# Altium PCB PCB1.PcbDoc (part 5 of 7)
Units mil, origin at the board's own origin, x right, y up, seen from the top; angles counter-clockwise.
Board outline 7650 x 4400 mil, 2 copper layers (Top Layer, Bottom Layer); 123 components, 190 nets, 788 pads, 165 vias.
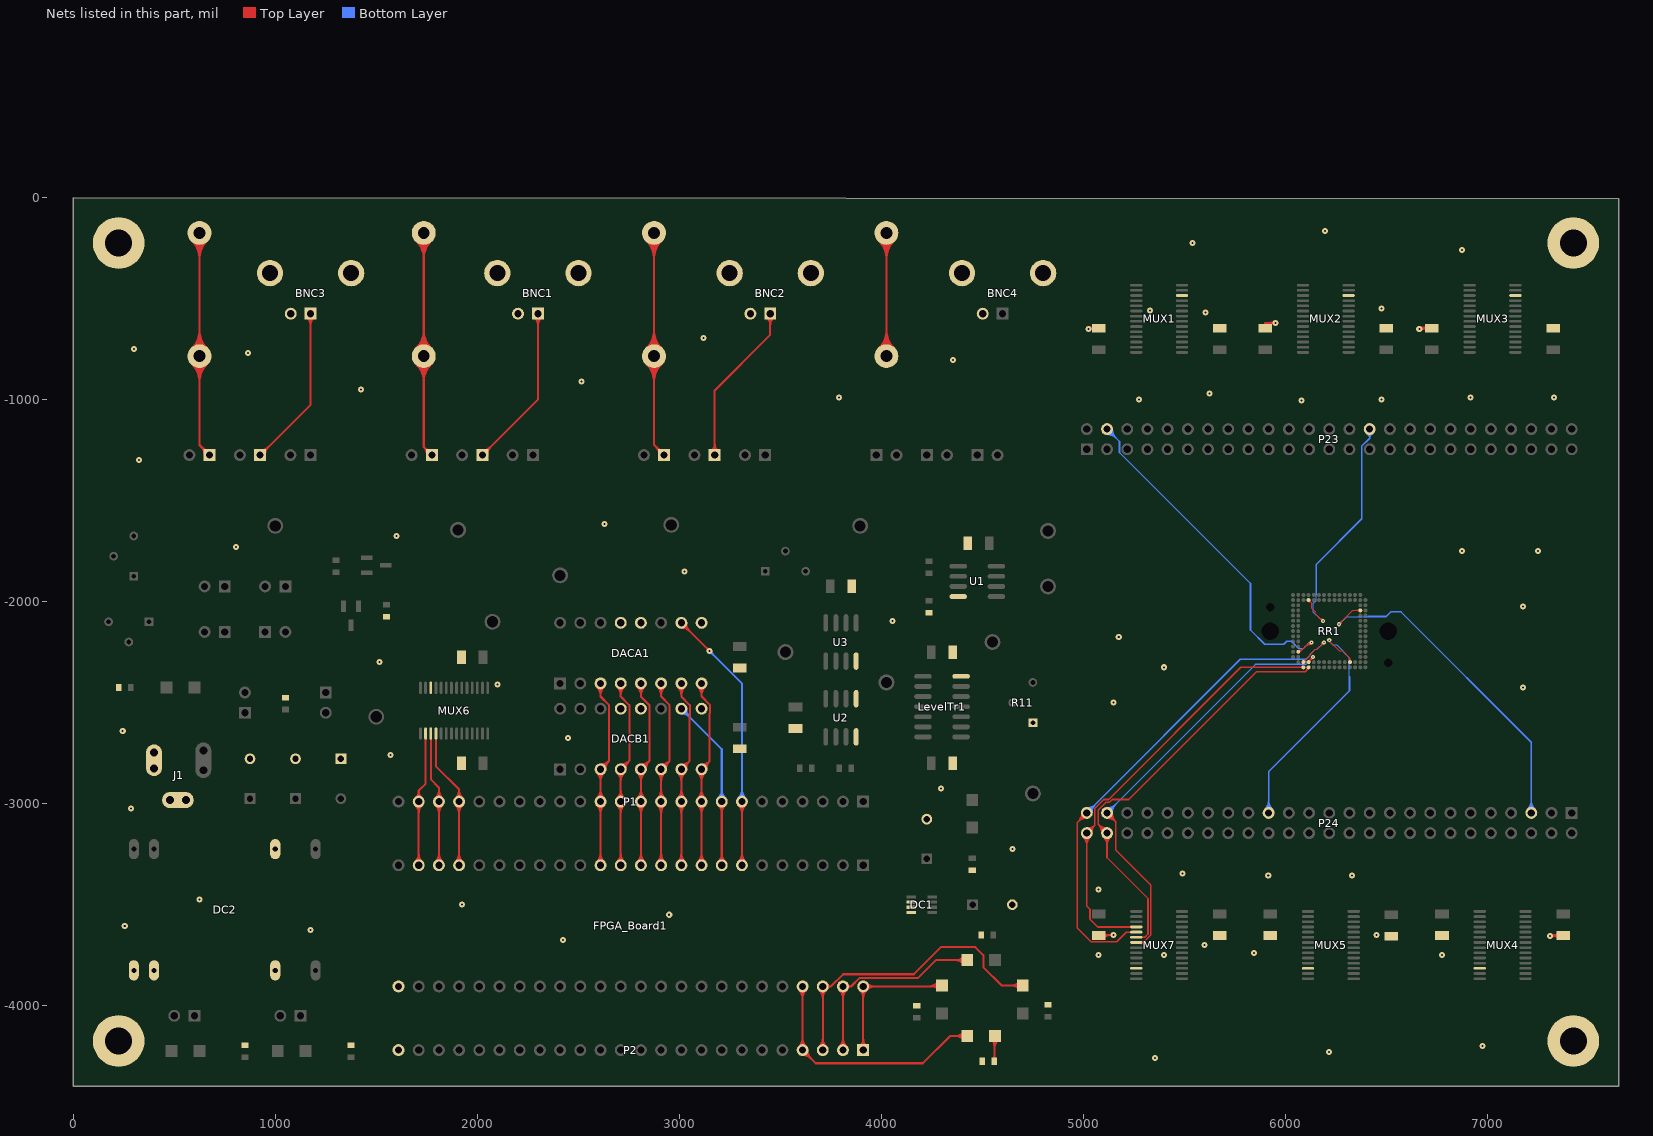
[diagram p5: the nets of this part, all layers, seen from the top]

## Via types
v1: diameter 30, hole 10, Top Layer to Bottom Layer, 118 vias
v2: diameter 20, hole 6, Top Layer to Bottom Layer, 47 vias

## Nets (pads, with @x,y where several pads share a name; then routed paths per layer and width w, separated by ;. In a path a pad name is that pad's centre, name@x,y a point inside that pad or via, vN(x,y) a via of type N, cw(c..) or ccw(c..) an arc to the next point about the centre after c; other vN are vias at no path point) (continued)
CELL92: MUX7.7 P24.47 RR1.97 | length 3256.5
  Top Layer w5: RR1.97@6112.03,-2299.01 cw(c6122.5,-2301.15) 6119.73,-2290.84 ; RR1.97@6112.74,-2292.45 ccw(c6105.79,-2266.51) v2@6129.05,-2279.94 ; RR1.97@6114.03,-2297.28 ccw(c6110.2,-2282.99) 6123.01,-2290.39 ; RR1.97@6114.64,-2299.54 6137.43,-2276.75 6137.43,-2275.2 6137.26,-2275.2 6137,-2274.94 v2(6137,-2274) ; RR1.97@6115.17,-2302.15 ccw(c6113.03,-2291.68) 6123.35,-2294.45 ; RR1.97@6117.39,-2292.73 ccw(c6118.99,-2288.75) 6122.72,-2290.9 ; 6120.75,-2288.23 cw(c6137,-2304.48) v2@6137,-2281.5 ; 6125.62,-2283.36 ccw(c6116.26,-2274) v2@6129.5,-2274 ; 6127.68,-2280.78 cw(c6140.56,-2284.23) v2@6136.18,-2271.64 ; 6127.17,-2287.01 ccw(c6139.71,-2299.54) 6121.98,-2299.54 cw(c6139.71,-2299.54) 6127.17,-2287.01 ; 6127.17,-2287.01 cw(c6114.64,-2274.47) 6114.64,-2292.2 ccw(c6114.64,-2274.47) 6127.17,-2287.01 ; v2@6129.5,-2274 cw(c6103.71,-2274) 6121.95,-2292.23 ccw(c6103.71,-2274) v2@6129.5,-2274 ; v2@6137,-2281.5 ccw(c6137,-2291.93) 6129.63,-2284.55 cw(c6137,-2291.93) v2@6137,-2281.5 ; RR1.97@6121.73,-2297.64 cw(c6130.03,-2295.42) 6122.59,-2291.12 ccw(c6130.03,-2295.42) RR1.97@6121.73,-2297.64 ; 6130.48,-2283.7 ccw(c6120.78,-2274) 6134.5,-2274 cw(c6120.78,-2274) 6130.48,-2283.7
  Top Layer w8: P24.47@5102.88,-3049.18 ccw(c5135.28,-3041.88) 5126.99,-3074.04 ; P24.47@5110.69,-3047.42 ccw(c5149.63,-3038.65) 5139.67,-3077.31 ; P24.47@5117,-3073 P24.47@5117,-3046 5160,-3089 ; P24.47@5118.42,-3039.69 cw(c5109.65,-3078.63) 5148.31,-3068.67 ; P24.47@5120.18,-3031.88 cw(c5112.88,-3064.28) 5145.04,-3055.99 ; MUX7.7@5261.81,-3687.2 5296.18,-3687.2 5333,-3650.38 5333,-3403 5160,-3230 5160,-3089 ; MUX7.7@5287.94,-3688.65 cw(c5302.23,-3696.9) 5297.96,-3680.96 ; 5146.52,-3075.52 ccw(c5117.56,-3104.49) 5117.17,-3063.53 cw(c5117.56,-3104.49) 5146.52,-3075.52 ; 5146.52,-3075.52 cw(c5175.49,-3046.56) 5134.53,-3046.17 ccw(c5175.49,-3046.56) 5146.52,-3075.52 ; 5160,-3089 ccw(c5117.81,-3131.18) 5117.24,-3071.53 cw(c5117.81,-3131.18) 5160,-3089 ; 5160,-3089 cw(c5202.18,-3046.81) 5142.53,-3046.24 ccw(c5202.18,-3046.81) 5160,-3089 ; 5292.41,-3687.2 ccw(c5292.41,-3694.18) 5287.48,-3689.25 cw(c5292.41,-3694.18) 5292.41,-3687.2 ; 5292.41,-3687.2 cw(c5292.41,-3680.23) 5287.48,-3685.16 ccw(c5292.41,-3680.23) 5292.41,-3687.2 ; MUX7.7@5285.43,-3692.32 ccw(c5285.43,-3678.71) 5295.06,-3688.33 cw(c5285.43,-3678.71) MUX7.7@5285.43,-3692.32 ; MUX7.7@5285.43,-3684.31 ccw(c5285.43,-3651.39) 5308.71,-3674.67 cw(c5285.43,-3651.39) MUX7.7@5285.43,-3684.31
  Bottom Layer w5: 6102,-2311 6137.26,-2275.74 6137.26,-2274.26 v2(6137,-2274) ; 6127.81,-2280.32 cw(c6139.84,-2283.54) v2@6136.29,-2271.6 ; 6122.78,-2290.22 ccw(c6106.57,-2274) 6129.5,-2274 cw(c6106.57,-2274) 6122.78,-2290.22 ; 6127.61,-2285.39 cw(c6137,-2294.78) 6137,-2281.5 ccw(c6137,-2294.78) 6127.61,-2285.39
  Bottom Layer w8: P24.47@5117,-3046 5852,-2311 6102,-2311 ; P24.47@5117,-3028.47 ccw(c5117,-2986.16) 5146.92,-3016.08 ccw(c5176.84,-3046) P24.47@5134.53,-3046 ; P24.47@5117,-3020.47 ccw(c5117,-2958.84) 5160.58,-3002.42 ccw(c5204.16,-3046) P24.47@5142.53,-3046
CELL93: MUX7.6 P24.48 RR1.98 | length 2508.4
  Top Layer w8: P24.48@5091.47,-3146 ccw(c5029.84,-3146) 5073.42,-3102.42 ccw(c5117,-3058.84) P24.48@5117,-3120.47 ; P24.48@5098.95,-3164.05 cw(c5055.37,-3207.63) 5117,-3207.63 cw(c5178.63,-3207.63) P24.48@5135.05,-3164.05 ; P24.48@5099.47,-3146 ccw(c5057.16,-3146) 5087.08,-3116.08 ccw(c5117,-3086.16) P24.48@5117,-3128.47 ; P24.48@5104.61,-3158.39 cw(c5074.68,-3188.32) 5117,-3188.32 cw(c5159.32,-3188.32) P24.48@5129.39,-3158.39 ; MUX7.6@5261.81,-3661.61 5303.39,-3661.61 5320,-3645 5320,-3470 5117,-3267 P24.48@5117,-3146 5073.31,-3102.31 5073.31,-3031.69 5112.73,-2992.27 5130.38,-2992.27 5143.38,-2979.27 5225,-2979.27 5857.29,-2346.98 6098.09,-2346.98 6114.64,-2330.43 RR1.98@6114.64,-2325.13 ; 5292.41,-3661.61 ccw(c5292.41,-3668.59) 5287.48,-3663.66 cw(c5292.41,-3668.59) 5292.41,-3661.61 ; 5292.41,-3661.61 cw(c5292.41,-3654.64) 5287.48,-3659.57 ccw(c5292.41,-3654.64) 5292.41,-3661.61 ; 6100.92,-2344.15 ccw(c6081.9,-2325.13) 6108.8,-2325.13 cw(c6081.9,-2325.13) 6100.92,-2344.15
CELL94: MUX7.5 P24.49 RR1.99 | length 3155.7
  Top Layer w5: RR1.99@6089.05,-2299.54 6089.05,-2297.2 6132.75,-2253.5 6132.75,-2251.5 6147.51,-2236.74 6158,-2236.74 6191,-2203.74 v2(6191,-2202) ; RR1.99@6089.84,-2302.08 ccw(c6086.18,-2290.42) 6097.99,-2293.58 ; 6181.83,-2208.22 cw(c6193.68,-2211.39) v2@6190.31,-2199.6 ; 6186.13,-2210.8 ccw(c6183.55,-2201.14) v2@6193.48,-2202.29 ; RR1.99@6089.05,-2292.2 ccw(c6089.05,-2280.12) 6097.59,-2288.66 cw(c6089.05,-2280.12) RR1.99@6089.05,-2292.2 ; RR1.99@6096.39,-2299.54 cw(c6119.76,-2299.54) 6103.24,-2283.02 ccw(c6119.76,-2299.54) RR1.99@6096.39,-2299.54 ; 6176.97,-2217.77 ccw(c6161.19,-2202) 6183.5,-2202 cw(c6161.19,-2202) 6176.97,-2217.77 ; 6181.17,-2213.57 cw(c6191,-2223.41) 6191,-2209.5 ccw(c6191,-2223.41) 6181.17,-2213.57
  Top Layer w8: P24.49@4991.47,-3046 cw(c4929.84,-3046) 4973.42,-3089.58 cw(c5017,-3133.16) P24.49@5017,-3071.53 ; P24.49@4999.47,-3046 cw(c4957.16,-3046) 4987.08,-3075.92 cw(c5017,-3105.84) P24.49@5017,-3063.53 ; P24.49@5017,-3046 4970,-3093 4970,-3616 5037.81,-3683.8 5165,-3683.8 5212.78,-3636.02 MUX7.5@5261.81,-3636.02 ; 5231.21,-3636.02 ccw(c5231.21,-3629.05) 5236.15,-3633.98 cw(c5231.21,-3629.05) 5231.21,-3636.02 ; 5231.21,-3636.02 cw(c5231.21,-3643) 5236.15,-3638.07 ccw(c5231.21,-3643) 5231.21,-3636.02
  Bottom Layer w5: 6102,-2286 6119.5,-2268.5 6119.5,-2266.25 6123.5,-2262.25 6123.5,-2260.75 6147.51,-2236.74 6156.26,-2236.74 v2(6191,-2202) ; 6178.2,-2214.8 ccw(c6165.39,-2202) 6183.5,-2202 cw(c6165.39,-2202) 6178.2,-2214.8 ; 6178.2,-2214.8 cw(c6191,-2227.61) 6191,-2209.5 ccw(c6191,-2227.61) 6178.2,-2214.8
  Bottom Layer w8: P24.49@5017,-3046 5777,-2286 6102,-2286 ; P24.49@5017,-3028.47 ccw(c5017,-2986.16) 5046.92,-3016.08 ccw(c5076.84,-3046) P24.49@5034.53,-3046 ; P24.49@5017,-3020.47 ccw(c5017,-2958.84) 5060.58,-3002.42 ccw(c5104.16,-3046) P24.49@5042.53,-3046
CELL95: MUX7.4 P24.50 RR1.100 | length 2502.1
  Top Layer w8: P24.50@4998.95,-3164.05 cw(c4955.37,-3207.63) 5017,-3207.63 cw(c5078.63,-3207.63) P24.50@5035.05,-3164.05 ; P24.50@5004.61,-3158.39 cw(c4974.68,-3188.32) 5017,-3188.32 cw(c5059.32,-3188.32) P24.50@5029.39,-3158.39 ; P24.50@5018.59,-3128.54 ccw(c5021.42,-3097.52) 5043.45,-3119.55 ccw(c5065.48,-3141.58) P24.50@5034.46,-3144.41 ; P24.50@5019.32,-3120.58 ccw(c5023.44,-3075.39) 5055.53,-3107.47 ccw(c5087.61,-3139.56) P24.50@5042.42,-3143.68 ; MUX7.4@5261.81,-3610.43 5070.74,-3610.43 5032.54,-3572.23 5032.54,-3522.54 5017,-3507 P24.50@5017,-3146 5055.53,-3107.47 5055.53,-3024.47 5100.73,-2979.27 5125,-2979.27 5779.14,-2325.13 RR1.100@6089.05,-2325.13 ; 5231.21,-3610.43 ccw(c5231.21,-3603.46) 5236.15,-3608.39 cw(c5231.21,-3603.46) 5231.21,-3610.43 ; 5231.21,-3610.43 cw(c5231.21,-3617.41) 5236.15,-3612.48 ccw(c5231.21,-3617.41) 5231.21,-3610.43 ; 6074.94,-2325.13 ccw(c6074.94,-2311.03) 6084.92,-2321 cw(c6074.94,-2311.03) 6074.94,-2325.13 ; 6074.94,-2325.13 cw(c6074.94,-2339.24) 6084.92,-2329.27 ccw(c6074.94,-2339.24) 6074.94,-2325.13
DAC0: DACA1.8 DACB1.8 FPGA_Board1.9 P1.9 | length 1813.8
  Top Layer w10: FPGA_Board1.9@3092.66,-3287.66 ccw(c3050.79,-3245.79) 3110,-3245.79 ccw(c3169.21,-3245.79) FPGA_Board1.9@3127.34,-3287.66 ; P1.9@3092.66,-3007.34 cw(c3050.79,-3049.21) 3110,-3049.21 cw(c3169.21,-3049.21) P1.9@3127.34,-3007.34 ; P1.9@3092.66,-2972.66 ccw(c3050.79,-2930.79) 3110,-2930.79 ccw(c3169.21,-2930.79) P1.9@3127.34,-2972.66 ; DACB1.8@3092.66,-2847.34 cw(c3050.79,-2889.21) 3110,-2889.21 cw(c3169.21,-2889.21) DACB1.8@3127.34,-2847.34 ; DACA1.8@3092.66,-2422.34 cw(c3050.78,-2464.22) 3110,-2464.22 cw(c3169.21,-2464.22) DACA1.8@3127.34,-2422.34 ; FPGA_Board1.9@3099.73,-3294.73 ccw(c3074.93,-3269.93) 3110,-3269.93 ccw(c3145.07,-3269.93) FPGA_Board1.9@3120.27,-3294.73 ; P1.9@3099.73,-3000.27 cw(c3074.93,-3025.07) 3110,-3025.07 cw(c3145.07,-3025.07) P1.9@3120.27,-3000.27 ; P1.9@3099.73,-2979.73 ccw(c3074.93,-2954.93) 3110,-2954.93 ccw(c3145.07,-2954.93) P1.9@3120.27,-2979.73 ; DACB1.8@3099.73,-2840.27 cw(c3074.93,-2865.07) 3110,-2865.07 cw(c3145.07,-2865.07) DACB1.8@3120.27,-2840.27 ; DACA1.8@3099.73,-2415.27 cw(c3074.93,-2440.07) 3110,-2440.07 cw(c3145.07,-2440.07) DACA1.8@3120.27,-2415.27 ; FPGA_Board1.9@3110,-3305 P1.9@3110,-2990 DACB1.8@3110,-2830 3150,-2790 ; DACA1.8@3110,-2405 3110,-2469.86 3152.53,-2512.38 3152.53,-2550.14 3150,-2552.67 3150,-2790 ; DACB1.8@3110.48,-2815.48 ccw(c3111.51,-2784.13) 3133.69,-2806.31 ccw(c3155.87,-2828.49) DACB1.8@3124.52,-2829.52 ; DACB1.8@3110.81,-2805.49 ccw(c3112.55,-2752.55) 3150,-2790 ; DACB1.8@3134.51,-2829.19 cw(c3187.45,-2827.45) 3150,-2790
DAC1: DACA1.7 DACB1.7 FPGA_Board1.10 P1.10 | length 1813.8
  Top Layer w10: FPGA_Board1.10@2992.66,-3287.66 ccw(c2950.79,-3245.79) 3010,-3245.79 ccw(c3069.21,-3245.79) FPGA_Board1.10@3027.34,-3287.66 ; P1.10@2992.66,-3007.34 cw(c2950.79,-3049.21) 3010,-3049.21 cw(c3069.21,-3049.21) P1.10@3027.34,-3007.34 ; P1.10@2992.66,-2972.66 ccw(c2950.79,-2930.79) 3010,-2930.79 ccw(c3069.21,-2930.79) P1.10@3027.34,-2972.66 ; DACB1.7@2992.66,-2847.34 cw(c2950.79,-2889.21) 3010,-2889.21 cw(c3069.21,-2889.21) DACB1.7@3027.34,-2847.34 ; DACA1.7@2992.66,-2422.34 cw(c2950.78,-2464.22) 3010,-2464.22 cw(c3069.21,-2464.22) DACA1.7@3027.34,-2422.34 ; FPGA_Board1.10@2999.73,-3294.73 ccw(c2974.93,-3269.93) 3010,-3269.93 ccw(c3045.07,-3269.93) FPGA_Board1.10@3020.27,-3294.73 ; P1.10@2999.73,-3000.27 cw(c2974.93,-3025.07) 3010,-3025.07 cw(c3045.07,-3025.07) P1.10@3020.27,-3000.27 ; P1.10@2999.73,-2979.73 ccw(c2974.93,-2954.93) 3010,-2954.93 ccw(c3045.07,-2954.93) P1.10@3020.27,-2979.73 ; DACB1.7@2999.73,-2840.27 cw(c2974.93,-2865.07) 3010,-2865.07 cw(c3045.07,-2865.07) DACB1.7@3020.27,-2840.27 ; DACA1.7@2999.73,-2415.27 cw(c2974.93,-2440.07) 3010,-2440.07 cw(c3045.07,-2440.07) DACA1.7@3020.27,-2415.27 ; FPGA_Board1.10@3010,-3305 P1.10@3010,-2990 DACB1.7@3010,-2830 3050,-2790 ; DACA1.7@3010,-2405 3010,-2469.86 3052.53,-2512.38 3052.53,-2562.57 3050,-2565.1 3050,-2790 ; DACB1.7@3010.48,-2815.48 ccw(c3011.51,-2784.13) 3033.69,-2806.31 ccw(c3055.87,-2828.49) DACB1.7@3024.52,-2829.52 ; DACB1.7@3010.81,-2805.49 ccw(c3012.55,-2752.55) 3050,-2790 ; DACB1.7@3034.51,-2829.19 cw(c3087.45,-2827.45) 3050,-2790
DAC2: DACA1.6 DACB1.6 FPGA_Board1.11 P1.11 | length 1823.9
  Top Layer w10: FPGA_Board1.11@2892.66,-3287.66 ccw(c2850.79,-3245.79) 2910,-3245.79 ccw(c2969.21,-3245.79) FPGA_Board1.11@2927.34,-3287.66 ; P1.11@2892.66,-3007.34 cw(c2850.79,-3049.21) 2910,-3049.21 cw(c2969.21,-3049.21) P1.11@2927.34,-3007.34 ; P1.11@2892.66,-2972.66 ccw(c2850.79,-2930.79) 2910,-2930.79 ccw(c2969.21,-2930.79) P1.11@2927.34,-2972.66 ; DACB1.6@2892.66,-2847.34 cw(c2850.79,-2889.21) 2910,-2889.21 cw(c2969.21,-2889.21) DACB1.6@2927.34,-2847.34 ; DACA1.6@2892.66,-2422.34 cw(c2850.78,-2464.22) 2910,-2464.22 cw(c2969.21,-2464.22) DACA1.6@2927.34,-2422.34 ; FPGA_Board1.11@2899.73,-3294.73 ccw(c2874.93,-3269.93) 2910,-3269.93 ccw(c2945.07,-3269.93) FPGA_Board1.11@2920.27,-3294.73 ; P1.11@2899.73,-3000.27 cw(c2874.93,-3025.07) 2910,-3025.07 cw(c2945.07,-3025.07) P1.11@2920.27,-3000.27 ; P1.11@2899.73,-2979.73 ccw(c2874.93,-2954.93) 2910,-2954.93 ccw(c2945.07,-2954.93) P1.11@2920.27,-2979.73 ; DACB1.6@2899.73,-2840.27 cw(c2874.93,-2865.07) 2910,-2865.07 cw(c2945.07,-2865.07) DACB1.6@2920.27,-2840.27 ; DACA1.6@2899.73,-2415.27 cw(c2874.93,-2440.07) 2910,-2440.07 cw(c2945.07,-2440.07) DACA1.6@2920.27,-2415.27 ; FPGA_Board1.11@2910,-3305 P1.11@2910,-2990 DACB1.6@2910,-2830 2952.53,-2787.47 2952.53,-2512.38 2910,-2469.86 DACA1.6@2910,-2405 ; DACB1.6@2910,-2815.47 ccw(c2910,-2780.4) 2934.8,-2805.2 ccw(c2959.6,-2830) DACB1.6@2924.53,-2830 ; DACB1.6@2910,-2805.47 ccw(c2910,-2746.26) 2951.87,-2788.13 ccw(c2993.74,-2830) DACB1.6@2934.53,-2830
DAC3: DACA1.5 DACB1.5 FPGA_Board1.12 P1.12 | length 1823.9
  Top Layer w10: FPGA_Board1.12@2792.66,-3287.66 ccw(c2750.79,-3245.79) 2810,-3245.79 ccw(c2869.21,-3245.79) FPGA_Board1.12@2827.34,-3287.66 ; P1.12@2792.66,-3007.34 cw(c2750.79,-3049.21) 2810,-3049.21 cw(c2869.21,-3049.21) P1.12@2827.34,-3007.34 ; P1.12@2792.66,-2972.66 ccw(c2750.79,-2930.79) 2810,-2930.79 ccw(c2869.21,-2930.79) P1.12@2827.34,-2972.66 ; DACB1.5@2792.66,-2847.34 cw(c2750.79,-2889.21) 2810,-2889.21 cw(c2869.21,-2889.21) DACB1.5@2827.34,-2847.34 ; DACA1.5@2792.66,-2422.34 cw(c2750.78,-2464.22) 2810,-2464.22 cw(c2869.21,-2464.22) DACA1.5@2827.34,-2422.34 ; FPGA_Board1.12@2799.73,-3294.73 ccw(c2774.93,-3269.93) 2810,-3269.93 ccw(c2845.07,-3269.93) FPGA_Board1.12@2820.27,-3294.73 ; P1.12@2799.73,-3000.27 cw(c2774.93,-3025.07) 2810,-3025.07 cw(c2845.07,-3025.07) P1.12@2820.27,-3000.27 ; P1.12@2799.73,-2979.73 ccw(c2774.93,-2954.93) 2810,-2954.93 ccw(c2845.07,-2954.93) P1.12@2820.27,-2979.73 ; DACB1.5@2799.73,-2840.27 cw(c2774.93,-2865.07) 2810,-2865.07 cw(c2845.07,-2865.07) DACB1.5@2820.27,-2840.27 ; DACA1.5@2799.73,-2415.27 cw(c2774.93,-2440.07) 2810,-2440.07 cw(c2845.07,-2440.07) DACA1.5@2820.27,-2415.27 ; FPGA_Board1.12@2810,-3305 P1.12@2810,-2990 DACB1.5@2810,-2830 2852.53,-2787.47 2852.53,-2512.38 2810,-2469.86 DACA1.5@2810,-2405 ; DACB1.5@2810,-2815.47 ccw(c2810,-2780.4) 2834.8,-2805.2 ccw(c2859.6,-2830) DACB1.5@2824.53,-2830 ; DACB1.5@2810,-2805.47 ccw(c2810,-2746.26) 2851.87,-2788.13 ccw(c2893.74,-2830) DACB1.5@2834.53,-2830
DAC4: DACA1.4 DACB1.4 FPGA_Board1.13 P1.13 | length 1823.9
  Top Layer w10: FPGA_Board1.13@2692.66,-3287.66 ccw(c2650.79,-3245.79) 2710,-3245.79 ccw(c2769.21,-3245.79) FPGA_Board1.13@2727.34,-3287.66 ; P1.13@2692.66,-3007.34 cw(c2650.79,-3049.21) 2710,-3049.21 cw(c2769.21,-3049.21) P1.13@2727.34,-3007.34 ; P1.13@2692.66,-2972.66 ccw(c2650.79,-2930.79) 2710,-2930.79 ccw(c2769.21,-2930.79) P1.13@2727.34,-2972.66 ; DACB1.4@2692.66,-2847.34 cw(c2650.79,-2889.21) 2710,-2889.21 cw(c2769.21,-2889.21) DACB1.4@2727.34,-2847.34 ; DACA1.4@2692.66,-2422.34 cw(c2650.78,-2464.22) 2710,-2464.22 cw(c2769.21,-2464.22) DACA1.4@2727.34,-2422.34 ; FPGA_Board1.13@2699.73,-3294.73 ccw(c2674.93,-3269.93) 2710,-3269.93 ccw(c2745.07,-3269.93) FPGA_Board1.13@2720.27,-3294.73 ; P1.13@2699.73,-3000.27 cw(c2674.93,-3025.07) 2710,-3025.07 cw(c2745.07,-3025.07) P1.13@2720.27,-3000.27 ; P1.13@2699.73,-2979.73 ccw(c2674.93,-2954.93) 2710,-2954.93 ccw(c2745.07,-2954.93) P1.13@2720.27,-2979.73 ; DACB1.4@2699.73,-2840.27 cw(c2674.93,-2865.07) 2710,-2865.07 cw(c2745.07,-2865.07) DACB1.4@2720.27,-2840.27 ; DACA1.4@2699.73,-2415.27 cw(c2674.93,-2440.07) 2710,-2440.07 cw(c2745.07,-2440.07) DACA1.4@2720.27,-2415.27 ; FPGA_Board1.13@2710,-3305 P1.13@2710,-2990 DACB1.4@2710,-2830 2752.53,-2787.47 2752.53,-2512.38 2710,-2469.86 DACA1.4@2710,-2405 ; DACB1.4@2710,-2815.47 ccw(c2710,-2780.4) 2734.8,-2805.2 ccw(c2759.6,-2830) DACB1.4@2724.53,-2830 ; DACB1.4@2710,-2805.47 ccw(c2710,-2746.26) 2751.87,-2788.13 ccw(c2793.74,-2830) DACB1.4@2734.53,-2830
DAC5: DACA1.3 DACB1.3 FPGA_Board1.14 P1.14 | length 1823.9
  Top Layer w10: FPGA_Board1.14@2592.66,-3287.66 ccw(c2550.79,-3245.79) 2610,-3245.79 ccw(c2669.21,-3245.79) FPGA_Board1.14@2627.34,-3287.66 ; P1.14@2592.66,-3007.34 cw(c2550.79,-3049.21) 2610,-3049.21 cw(c2669.21,-3049.21) P1.14@2627.34,-3007.34 ; P1.14@2592.66,-2972.66 ccw(c2550.79,-2930.79) 2610,-2930.79 ccw(c2669.21,-2930.79) P1.14@2627.34,-2972.66 ; DACB1.3@2592.66,-2847.34 cw(c2550.79,-2889.21) 2610,-2889.21 cw(c2669.21,-2889.21) DACB1.3@2627.34,-2847.34 ; DACA1.3@2592.66,-2422.34 cw(c2550.78,-2464.22) 2610,-2464.22 cw(c2669.21,-2464.22) DACA1.3@2627.34,-2422.34 ; FPGA_Board1.14@2599.73,-3294.73 ccw(c2574.93,-3269.93) 2610,-3269.93 ccw(c2645.07,-3269.93) FPGA_Board1.14@2620.27,-3294.73 ; P1.14@2599.73,-3000.27 cw(c2574.93,-3025.07) 2610,-3025.07 cw(c2645.07,-3025.07) P1.14@2620.27,-3000.27 ; P1.14@2599.73,-2979.73 ccw(c2574.93,-2954.93) 2610,-2954.93 ccw(c2645.07,-2954.93) P1.14@2620.27,-2979.73 ; DACB1.3@2599.73,-2840.27 cw(c2574.93,-2865.07) 2610,-2865.07 cw(c2645.07,-2865.07) DACB1.3@2620.27,-2840.27 ; DACA1.3@2599.73,-2415.27 cw(c2574.93,-2440.07) 2610,-2440.07 cw(c2645.07,-2440.07) DACA1.3@2620.27,-2415.27 ; FPGA_Board1.14@2610,-3305 P1.14@2610,-2990 DACB1.3@2610,-2830 2652.53,-2787.47 2652.53,-2512.38 2610,-2469.86 DACA1.3@2610,-2405 ; DACB1.3@2610,-2815.47 ccw(c2610,-2780.4) 2634.8,-2805.2 ccw(c2659.6,-2830) DACB1.3@2624.53,-2830 ; DACB1.3@2610,-2805.47 ccw(c2610,-2746.26) 2651.87,-2788.13 ccw(c2693.74,-2830) DACB1.3@2634.53,-2830
DACASELECT: DACA1.10 FPGA_Board1.7 P1.7 | length 1992.5
  Top Layer w10: DACA1.10@3010,-2129.53 cw(c3010,-2188.74) 3051.87,-2146.87 cw(c3093.74,-2105) DACA1.10@3034.53,-2105 ; DACA1.10@3010,-2119.53 cw(c3010,-2154.6) 3034.8,-2129.8 cw(c3059.6,-2105) DACA1.10@3024.53,-2105 ; DACA1.10@3010,-2105 v1(3150,-2245) ; v1@3140,-2245 ccw(c3115.86,-2245) 3132.93,-2227.93 ccw(c3150,-2210.86) v1@3150,-2235 ; FPGA_Board1.7@3292.66,-3287.66 ccw(c3250.79,-3245.79) 3310,-3245.79 ccw(c3369.21,-3245.79) FPGA_Board1.7@3327.34,-3287.66 ; P1.7@3292.66,-3007.34 cw(c3250.79,-3049.21) 3310,-3049.21 cw(c3369.21,-3049.21) P1.7@3327.34,-3007.34 ; FPGA_Board1.7@3299.73,-3294.73 ccw(c3274.93,-3269.93) 3310,-3269.93 ccw(c3345.07,-3269.93) FPGA_Board1.7@3320.27,-3294.73 ; P1.7@3299.73,-3000.27 cw(c3274.93,-3025.07) 3310,-3025.07 cw(c3345.07,-3025.07) P1.7@3320.27,-3000.27 ; FPGA_Board1.7@3310,-3305 P1.7@3310,-2990
  Bottom Layer w10: v1@3150,-2255 cw(c3150,-2279.14) 3167.07,-2262.07 cw(c3184.14,-2245) v1@3160,-2245 ; v1(3150,-2245) 3310,-2405 P1.7@3310,-2990 ; P1.7@3292.66,-2972.66 ccw(c3250.79,-2930.79) 3310,-2930.79 ccw(c3369.21,-2930.79) P1.7@3327.34,-2972.66 ; P1.7@3299.73,-2979.73 ccw(c3274.93,-2954.93) 3310,-2954.93 ccw(c3345.07,-2954.93) P1.7@3320.27,-2979.73
DACBSELECT: DACB1.10 FPGA_Board1.8 P1.8 | length 1450.3
  Top Layer w10: FPGA_Board1.8@3192.66,-3287.66 ccw(c3150.79,-3245.79) 3210,-3245.79 ccw(c3269.21,-3245.79) FPGA_Board1.8@3227.34,-3287.66 ; P1.8@3192.66,-3007.34 cw(c3150.79,-3049.21) 3210,-3049.21 cw(c3269.21,-3049.21) P1.8@3227.34,-3007.34 ; FPGA_Board1.8@3199.73,-3294.73 ccw(c3174.93,-3269.93) 3210,-3269.93 ccw(c3245.07,-3269.93) FPGA_Board1.8@3220.27,-3294.73 ; P1.8@3199.73,-3000.27 cw(c3174.93,-3025.07) 3210,-3025.07 cw(c3245.07,-3025.07) P1.8@3220.27,-3000.27 ; FPGA_Board1.8@3210,-3305 P1.8@3210,-2990
  Bottom Layer w10: DACB1.10@3010,-2554.53 cw(c3010,-2613.74) 3051.87,-2571.87 cw(c3093.74,-2530) DACB1.10@3034.53,-2530 ; DACB1.10@3010,-2544.53 cw(c3010,-2579.6) 3034.8,-2554.8 cw(c3059.6,-2530) DACB1.10@3024.53,-2530 ; DACB1.10@3010,-2530 3210,-2730 P1.8@3210,-2990 ; P1.8@3192.66,-2972.66 ccw(c3150.79,-2930.79) 3210,-2930.79 ccw(c3269.21,-2930.79) P1.8@3227.34,-2972.66 ; P1.8@3199.73,-2979.73 ccw(c3174.93,-2954.93) 3210,-2954.93 ccw(c3245.07,-2954.93) P1.8@3220.27,-2979.73
ENABLERW: FPGA_Board1.21 MUX6.18 P1.21 | length 1143.6
  Top Layer w10: MUX6.18@1795.43,-2653.19 1795.43,-2815.43 1910,-2930 P1.21@1910,-2990 FPGA_Board1.21@1910,-3305 ; FPGA_Board1.21@1892.66,-3287.66 ccw(c1850.79,-3245.79) 1910,-3245.79 ccw(c1969.21,-3245.79) FPGA_Board1.21@1927.34,-3287.66 ; P1.21@1892.66,-3007.34 cw(c1850.79,-3049.21) 1910,-3049.21 cw(c1969.21,-3049.21) P1.21@1927.34,-3007.34 ; P1.21@1892.66,-2972.66 ccw(c1850.79,-2930.79) 1910,-2930.79 ccw(c1969.21,-2930.79) P1.21@1927.34,-2972.66 ; FPGA_Board1.21@1899.73,-3294.73 ccw(c1874.93,-3269.93) 1910,-3269.93 ccw(c1945.07,-3269.93) FPGA_Board1.21@1920.27,-3294.73 ; P1.21@1899.73,-3000.27 cw(c1874.93,-3025.07) 1910,-3025.07 cw(c1945.07,-3025.07) P1.21@1920.27,-3000.27 ; P1.21@1899.73,-2979.73 ccw(c1874.93,-2954.93) 1910,-2954.93 ccw(c1945.07,-2954.93) P1.21@1920.27,-2979.73
GND: B2.1 BNC1.2 BNC2.2 BNC3.2 BNC4.2 C1.1 C2.2 C3.2 C4.2 C5.2 C6.1 C7.2 C8.1 C9.1 C10.1 C11.2 C12.2 C13.2 C14.2 C15.1 C16.2 C17.1 C18.1 C19.1 C20.1 C21.2 C22.1 C23.2 C24.1 C25.1 C26.1 DACA1.9 DACA1.12 DACA1.13 DACB1.9 DACB1.12 DACB1.13 DC1.2 DC1.3 DC1.4 DC2.2 DC2.3 DC2.9 DC2.16 FPGA_Board1.25 H1.1 H2.1 H3.1 H4.1 J1.2 J1.2A J1.2B J1.3 J1.3A J1.3B LevelTr1.7 MUX1.12 MUX2.12 MUX3.12 MUX4.12 MUX5.12 MUX6.12 MUX7.12 P2.24 P23.4 P23.30 P24.5 P24.31 R1.1 R2.1 R3.1 R4.1 R5.2 R6.2 R7.2 R8.2 R11.1 R12.1 R18.2 R19.1 RR1.4 RR1.30 RR1.55 RR1.81 U1.4 U2.4 U2.5 U3.4 | length 12870.9
  Top Layer w5: RR1.4@6061.14,-2247.06 cw(c6076.27,-2255.55) 6071.78,-2238.79 ; RR1.4@6063.46,-2248.36 6072.16,-2248.36 6117.52,-2203 ; RR1.4@6065.5,-2249.51 cw(c6090.72,-2263.65) 6083.24,-2235.72 ; RR1.4@6067.13,-2242 ccw(c6072.13,-2233.34) 6074.72,-2243 ; 6108.15,-2216.09 ccw(c6100.19,-2186.37) v2@6126.83,-2201.75 ; RR1.30@6112.03,-1992.99 ccw(c6122.5,-1990.85) 6119.73,-2001.16 ; RR1.30@6114.64,-1992.46 6130.23,-2008.05 6130.23,-2033.37 6147,-2050.14 6147,-2061 6147.25,-2061 6182.25,-2096 v2(6187,-2096) ; RR1.30@6115.17,-1989.85 cw(c6113.03,-2000.32) 6123.35,-1997.55 ; 6117.77,-2208.51 cw(c6120.32,-2218.04) v2@6125.25,-2209.5 ; 6118.95,-2208.19 ccw(c6115.75,-2196.23) v2@6126.77,-2201.86 ; 6119.81,-2212.96 ccw(c6114.97,-2194.9) v2@6131.17,-2204.25 ; v2(6129,-2203) 6117.52,-2203 ; 6169.86,-2083.91 cw(c6164.09,-2105.41) v2@6184.69,-2096.95 ; 6179.61,-2086.52 cw(c6175.85,-2100.58) v2@6189.31,-2095.05 ; v2(6217,-2191) 6217,-2195.75 6265.25,-2244 6284.04,-2244 6319.36,-2279.32 RR1.81@6319.36,-2299.54 ; v2@6262.55,-2111.5 cw(c6273.41,-2113.72) 6270.54,-2103.02 ; v2(6265,-2112) 6333.36,-2043.64 RR1.55@6370.54,-2043.64 ; v2@6265.5,-2114.45 ccw(c6263.28,-2103.59) 6273.98,-2106.46 ; 6117.52,-2203 ccw(c6117.52,-2197.97) 6122.13,-2199.99 cw(c6117.52,-2197.97) 6117.52,-2203 ; 6117.52,-2203 cw(c6117.52,-2208.03) 6122.13,-2206.01 ccw(c6117.52,-2208.03) 6117.52,-2203 ; 6127.17,-2004.99 ccw(c6114.64,-2017.53) 6114.64,-1999.8 cw(c6114.64,-2017.53) 6127.17,-2004.99 ; 6127.17,-2004.99 cw(c6139.71,-1992.46) 6121.98,-1992.46 ccw(c6139.71,-1992.46) 6127.17,-2004.99 ; 6277.8,-2099.2 ccw(c6290.61,-2112) 6272.5,-2112 cw(c6290.61,-2112) 6277.8,-2099.2 ; 6277.8,-2099.2 cw(c6265,-2086.39) 6265,-2104.5 ccw(c6265,-2086.39) 6277.8,-2099.2 ; 6319.36,-2281.82 ccw(c6337.09,-2281.82) 6324.55,-2294.35 cw(c6337.09,-2281.82) 6319.36,-2281.82 ; 6319.36,-2281.82 cw(c6301.64,-2281.82) 6314.17,-2294.35 ccw(c6301.64,-2281.82) 6319.36,-2281.82 ; 6352.82,-2043.64 ccw(c6352.82,-2025.91) 6365.35,-2038.45 cw(c6352.82,-2025.91) 6352.82,-2043.64 ; 6352.82,-2043.64 cw(c6352.82,-2061.36) 6365.35,-2048.83 ccw(c6352.82,-2061.36) 6352.82,-2043.64 ; RR1.4@6063.46,-2251.02 ccw(c6063.46,-2236.42) 6073.78,-2246.74 cw(c6063.46,-2236.42) RR1.4@6063.46,-2251.02 ; RR1.4@6063.46,-2246.02 ccw(c6063.46,-2219.35) 6082.32,-2238.21 cw(c6063.46,-2219.35) RR1.4@6063.46,-2246.02 ; RR1.4@6063.46,-2241.02 ccw(c6063.46,-2202.28) 6090.85,-2229.67 cw(c6063.46,-2202.28) RR1.4@6063.46,-2241.02 ; 6096.61,-2223.92 cw(c6129,-2256.31) 6129,-2210.5 ccw(c6129,-2256.31) 6096.61,-2223.92 ; 6105.14,-2215.38 cw(c6129,-2239.24) 6129,-2205.5 ccw(c6129,-2239.24) 6105.14,-2215.38 ; 6113.68,-2206.85 cw(c6129,-2222.17) 6129,-2200.5 ccw(c6129,-2222.17) 6113.68,-2206.85 ; 6166.09,-2079.84 ccw(c6187,-2058.93) 6187,-2088.5 cw(c6187,-2058.93) 6166.09,-2079.84 ; 6174.63,-2088.37 ccw(c6187,-2076) 6187,-2093.5 cw(c6187,-2076) 6174.63,-2088.37 ; 6177.55,-2091.3 cw(c6172.86,-2096) 6179.5,-2096 ccw(c6172.86,-2096) 6177.55,-2091.3
  Top Layer w10: B2.1@4025,-785.24 B2.1@4025,-175 ; C25.1@5075,-3653.15 5075,-3650 v1(5150,-3650) ; C4.2@5075,-646.85 v1@5025,-646.85 ; C5.2@5900,-646.85 5900,-620 ; v1(5950,-620) 5900,-620 ; v1(6662.5,-650) 6662.5,-646.85 C6.1@6725,-646.85 ; C6.1@6698.66,-638.71 cw(c6679.24,-627.82) 6685,-649.33 cw(c6688.14,-661.05) C6.1@6698.7,-655.06 ; v1(7310,-3655) 7310,-3653.15 C9.1@7375,-3653.15 ; 4025,-703.02 ccw(c4107.22,-703.02) 4049.08,-761.16 cw(c4107.22,-703.02) 4025,-703.02 ; 4025,-703.02 cw(c3942.78,-703.02) 4000.92,-761.16 ccw(c3942.78,-703.02) 4025,-703.02 ; 4025,-678.88 ccw(c4131.36,-678.88) 4056.15,-754.08 cw(c4131.36,-678.88) 4025,-678.88 ; 4025,-678.88 cw(c3918.64,-678.88) 3993.85,-754.08 ccw(c3918.64,-678.88) 4025,-678.88 ; 4025,-654.74 ccw(c4155.5,-654.74) 4063.22,-747.01 cw(c4155.5,-654.74) 4025,-654.74 ; 4025,-654.74 cw(c3894.5,-654.74) 3986.78,-747.01 ccw(c3894.5,-654.74) 4025,-654.74 ; 4025,-305.5 ccw(c3894.5,-305.5) 3986.78,-213.22 cw(c3894.5,-305.5) 4025,-305.5 ; 4025,-305.5 cw(c4155.5,-305.5) 4063.22,-213.22 ccw(c4155.5,-305.5) 4025,-305.5 ; 4025,-281.36 ccw(c3918.64,-281.36) 3993.85,-206.15 cw(c3918.64,-281.36) 4025,-281.36 ; 4025,-281.36 cw(c4131.36,-281.36) 4056.15,-206.15 ccw(c4131.36,-281.36) 4025,-281.36 ; 4025,-257.22 ccw(c3942.78,-257.22) 4000.92,-199.08 cw(c3942.78,-257.22) 4025,-257.22 ; 4025,-257.22 cw(c4107.22,-257.22) 4049.08,-199.08 ccw(c4107.22,-257.22) 4025,-257.22 ; v1@5025,-646.85 ccw(c5025,-611.39) 5050.98,-635.52 cw(c5025,-611.39) v1@5025,-646.85 ; v1@5025,-646.85 cw(c5025,-682.31) 5050.98,-658.18 ccw(c5025,-682.31) v1@5025,-646.85 ; v1@5030,-641.34 ccw(c5036.88,-629.43) 5040.44,-642.71 ; v1@5030,-641.34 ccw(c5036.88,-629.43) 5040.44,-642.71 ; v1@5030,-641.34 ccw(c5036.88,-629.43) 5040.44,-642.71 ; 5125.86,-3650 ccw(c5125.86,-3625.86) 5142.93,-3642.93 cw(c5125.86,-3625.86) 5125.86,-3650 ; 5125.86,-3650 cw(c5125.86,-3674.14) 5142.93,-3657.07 ccw(c5125.86,-3674.14) 5125.86,-3650 ; 5900,-620 ccw(c5913.32,-620) 5907.4,-631.93 cw(c5913.32,-620) 5900,-620 ; 5900,-620 cw(c5886.68,-620) 5892.6,-631.93 ccw(c5886.68,-620) 5900,-620 ; 5925.86,-620 ccw(c5925.86,-595.86) 5942.93,-612.93 cw(c5925.86,-595.86) 5925.86,-620 ; 5925.86,-620 cw(c5925.86,-644.14) 5942.93,-627.07 ccw(c5925.86,-644.14) 5925.86,-620 ; v1@6667.5,-641.34 ccw(c6679.01,-621.4) 6684.97,-643.64 ; v1@6667.5,-641.34 ccw(c6679.01,-621.4) 6684.97,-643.64 ; v1@6667.5,-641.34 ccw(c6679.01,-621.4) 6684.97,-643.64 ; v1@6671.16,-655 cw(c6693.04,-667.63) 6686.5,-643.23 ; v1@6671.16,-655 cw(c6693.04,-667.63) 6686.5,-643.23 ; v1@6671.16,-655 cw(c6693.04,-667.63) 6686.5,-643.23 ; v1@6671.25,-654.84 cw(c6680.67,-660.06) 6683.46,-649.66 ; v1@6671.25,-654.84 cw(c6680.67,-660.06) 6683.46,-649.66 ; v1@6671.25,-654.84 cw(c6680.67,-660.06) 6683.46,-649.66 ; v1@6672.98,-646.85 ccw(c6672.98,-606.65) 6701.41,-635.07 cw(c6672.98,-606.65) v1@6672.98,-646.85 ; v1@6672.98,-646.85 cw(c6672.98,-687.06) 6701.41,-658.63 ccw(c6672.98,-687.06) v1@6672.98,-646.85 ; v1@7315,-3646.34 ccw(c7329.76,-3620.78) 7337.4,-3649.29 ; v1@7315,-3646.34 ccw(c7329.76,-3620.78) 7337.4,-3649.29 ; v1@7315,-3646.34 ccw(c7329.76,-3620.78) 7337.4,-3649.29 ; v1@7317.62,-3661.48 cw(c7330.2,-3672.18) 7334.47,-3656.23 ; v1@7317.62,-3661.48 cw(c7330.2,-3672.18) 7334.47,-3656.23 ; v1@7317.62,-3661.48 cw(c7330.2,-3672.18) 7334.47,-3656.23 ; v1@7318.66,-3660 cw(c7334.92,-3669.39) 7330.06,-3651.25 ; v1@7318.66,-3660 cw(c7334.92,-3669.39) 7330.06,-3651.25 ; v1@7318.66,-3660 cw(c7334.92,-3669.39) 7330.06,-3651.25 ; v1@7322.98,-3653.15 ccw(c7322.98,-3612.94) 7351.41,-3641.37 cw(c7322.98,-3612.94) v1@7322.98,-3653.15 ; v1@7322.98,-3653.15 cw(c7322.98,-3693.35) 7351.41,-3664.93 ccw(c7322.98,-3693.35) v1@7322.98,-3653.15 ; v1@5032.07,-657.07 cw(c5056.75,-681.75) 5056.75,-646.85 ccw(c5056.75,-681.75) v1@5032.07,-657.07 ; v1@5032.07,-642.93 ccw(c5041.54,-633.46) 5041.54,-646.85 cw(c5041.54,-633.46) v1@5032.07,-642.93 ; C25.1@5091.52,-3657.85 cw(c5110.48,-3676.82) 5110.48,-3650 ccw(c5110.48,-3676.82) C25.1@5091.52,-3657.85 ; C25.1@5098.59,-3664.93 cw(c5134.62,-3700.96) 5134.62,-3650 ccw(c5134.62,-3700.96) C25.1@5098.59,-3664.93 ; C25.1@5098.59,-3641.37 ccw(c5119.41,-3620.55) 5119.41,-3650 cw(c5119.41,-3620.55) C25.1@5098.59,-3641.37 ; v1@6669.57,-657.07 cw(c6694.25,-681.75) 6694.25,-646.85 ccw(c6694.25,-681.75) v1@6669.57,-657.07 ; v1@6669.57,-642.93 ccw(c6679.04,-633.46) 6679.04,-646.85 cw(c6679.04,-633.46) v1@6669.57,-642.93 ; v1@7317.07,-3662.07 cw(c7338.61,-3683.61) 7338.61,-3653.15 ccw(c7338.61,-3683.61) v1@7317.07,-3662.07 ; v1@7317.07,-3647.93 ccw(c7329.67,-3635.33) 7329.67,-3653.15 cw(c7329.67,-3635.33) v1@7317.07,-3647.93
  Bottom Layer w5: 6049,-2215 6063.89,-2229.89 6090.64,-2229.89 6117.52,-2203 ; 6108.15,-2216.09 ccw(c6100.19,-2186.37) v2@6126.83,-2201.75 ; 6117.77,-2208.51 cw(c6120.32,-2218.04) v2@6125.25,-2209.5 ; 6118.95,-2208.19 ccw(c6115.75,-2196.23) v2@6126.77,-2201.86 ; 6119.81,-2212.96 ccw(c6114.97,-2194.9) v2@6131.17,-2204.25 ; v2(6129,-2203) 6117.52,-2203 ; 6152,-1965 6152,-1994.74 6138.82,-2007.92 6138.82,-2051.86 6172,-2085.04 6172,-2086 6177,-2086 v2(6187,-2096) ; v2(6217,-2191) 6217,-2195.75 6234.75,-2213.5 6253.54,-2213.5 6317,-2276.96 6317,-2371 ; v2(6265,-2112) 6303,-2074 6410,-2074 ; 6117.52,-2203 ccw(c6117.52,-2197.97) 6122.13,-2199.99 cw(c6117.52,-2197.97) 6117.52,-2203 ; 6117.52,-2203 cw(c6117.52,-2208.03) 6122.13,-2206.01 ccw(c6117.52,-2208.03) 6117.52,-2203 ; 6277.8,-2099.2 ccw(c6290.61,-2112) 6272.5,-2112 cw(c6290.61,-2112) 6277.8,-2099.2 ; 6277.8,-2099.2 cw(c6265,-2086.39) 6265,-2104.5 ccw(c6265,-2086.39) 6277.8,-2099.2 ; 6096.61,-2223.92 cw(c6129,-2256.31) 6129,-2210.5 ccw(c6129,-2256.31) 6096.61,-2223.92 ; 6105.14,-2215.38 cw(c6129,-2239.24) 6129,-2205.5 ccw(c6129,-2239.24) 6105.14,-2215.38 ; 6113.68,-2206.85 cw(c6129,-2222.17) 6129,-2200.5 ccw(c6129,-2222.17) 6113.68,-2206.85
  Bottom Layer w8: P23.4@5102.82,-1148.9 ccw(c5135.05,-1142.3) 5126.54,-1174.08 ; P23.4@5110.66,-1147.3 ccw(c5149.24,-1139.4) 5139.04,-1177.43 ; P23.4@5116.69,-1147.5 cw(c5107.49,-1192.42) 5151.79,-1180.55 ; P23.4@5117,-1146 5178.47,-1207.47 5178.47,-1261.96 5827,-1910.49 5827,-2140.68 5897.63,-2211.31 5991.69,-2211.31 6007,-2196 6030,-2196 6049,-2215 ; P23.4@5118.3,-1139.66 cw(c5110.4,-1178.24) 5148.43,-1168.04 ; P23.4@5118.5,-1145.69 ccw(c5163.42,-1136.49) 5151.55,-1180.79 ; P23.4@5119.9,-1131.82 cw(c5113.3,-1164.05) 5145.08,-1155.54 ; P23.4@5124.47,-1170.41 cw(c5131.08,-1191.98) 5146.92,-1175.92 ; P23.4@5124.62,-1170.36 cw(c5131.21,-1191.42) 5146.92,-1175.92 ; P23.4@5141.36,-1153.62 ccw(c5162.42,-1160.21) 5146.92,-1175.92 ; P23.4@5141.41,-1153.47 ccw(c5162.98,-1160.08) 5146.92,-1175.92 ; P24.31@5917,-3046 5917,-2841 6317,-2441 6317,-2371 ; 6152,-1965 6152,-1816 6378.47,-1589.53 6378.47,-1230.04 6417,-1191.51 ; 6410,-2074 6499,-2074 6522,-2051 6572,-2051 7217,-2696 P24.5@7217,-3046 ; P23.30@6417,-1146 6417,-1191.51 ; 5146.92,-1175.92 ccw(c5117,-1205.84) 5117,-1163.53 cw(c5117,-1205.84) 5146.92,-1175.92 ; 5146.92,-1175.92 cw(c5176.84,-1146) 5134.53,-1146 ccw(c5176.84,-1146) 5146.92,-1175.92 ; 5160.58,-1189.58 ccw(c5117,-1233.16) 5117,-1171.53 cw(c5117,-1233.16) 5160.58,-1189.58 ; 5160.58,-1189.58 cw(c5204.16,-1146) 5142.53,-1146 ccw(c5204.16,-1146) 5160.58,-1189.58 ; 5917,-3003.68 ccw(c5959.32,-3003.68) 5929.39,-3033.61 cw(c5959.32,-3003.68) 5917,-3003.68 ; 5917,-3003.68 cw(c5874.68,-3003.68) 5904.61,-3033.61 ccw(c5874.68,-3003.68) 5917,-3003.68 ; 5917,-2984.37 ccw(c5978.63,-2984.37) 5935.05,-3027.95 cw(c5978.63,-2984.37) 5917,-2984.37 ; 5917,-2984.37 cw(c5855.37,-2984.37) 5898.95,-3027.95 ccw(c5855.37,-2984.37) 5917,-2984.37 ; 6417,-1191.51 ccw(c6389.19,-1191.51) 6403.69,-1167.78 cw(c6389.19,-1191.51) 6417,-1191.51 ; 6417,-1191.51 cw(c6444.81,-1191.51) 6430.31,-1167.78 ccw(c6444.81,-1191.51) 6417,-1191.51 ; 6417,-1177.25 ccw(c6397.91,-1177.25) 6407.86,-1160.96 cw(c6397.91,-1177.25) 6417,-1177.25 ; 6417,-1177.25 cw(c6436.09,-1177.25) 6426.14,-1160.96 ccw(c6436.09,-1177.25) 6417,-1177.25 ; 7217,-3003.68 ccw(c7259.32,-3003.68) 7229.39,-3033.61 cw(c7259.32,-3003.68) 7217,-3003.68 ; 7217,-3003.68 cw(c7174.68,-3003.68) 7204.61,-3033.61 ccw(c7174.68,-3003.68) 7217,-3003.68 ; 7217,-2984.37 ccw(c7278.63,-2984.37) 7235.05,-3027.95 cw(c7278.63,-2984.37) 7217,-2984.37 ; 7217,-2984.37 cw(c7155.37,-2984.37) 7198.95,-3027.95 ccw(c7155.37,-2984.37) 7217,-2984.37
  other v1: 5355,-4260 6215,-4230 6975,-4200 5075,-3750 5400,-3750 6775,-3750 5845,-3740 5600,-3700 2425,-3675 6450,-3650 1175,-3625 255,-3605 2950,-3550 1925,-3500 625,-3475 5075,-3425 5915,-3355 6330,-3355 5490,-3345 4650,-3225 285,-3025 4295,-2925 1570,-2760 2450,-2675 245,-2640 5150,-2500 7175,-2425 2100,-2410 5400,-2325 1515,-2300 5175,-2175 4055,-2095 7175,-2025 3025,-1850 6875,-1750 7250,-1750 805,-1730 1600,-1675 2630,-1615 325,-1300 6080,-1005 5275,-1000 6475,-1000 3790,-990 6915,-990 7330,-990 5625,-970 1425,-950 2515,-910 4355,-805 865,-770 300,-750 3120,-695 5025,-650 5605,-570 5330,-560 6475,-550 6875,-260 5540,-225 6195,-165
LED_AM: AM1.1 FPGA_Board1.45 P2.4 | length 1805.3
  Top Layer w10: P2.4@3592.66,-4202.66 ccw(c3550.79,-4160.79) 3610,-4160.79 ccw(c3669.21,-4160.79) P2.4@3627.34,-4202.66 ; FPGA_Board1.45@3592.66,-3922.34 cw(c3550.79,-3964.21) 3610,-3964.21 cw(c3669.21,-3964.21) FPGA_Board1.45@3627.34,-3922.34 ; P2.4@3599.73,-4209.73 ccw(c3574.93,-4184.93) 3610,-4184.93 ccw(c3645.07,-4184.93) P2.4@3620.27,-4209.73 ; FPGA_Board1.45@3599.73,-3915.27 cw(c3574.93,-3940.07) 3610,-3940.07 cw(c3645.07,-3940.07) FPGA_Board1.45@3620.27,-3915.27 ; P2.4@3610,-4244.53 cw(c3610,-4303.74) 3651.87,-4261.87 cw(c3693.74,-4220) P2.4@3634.53,-4220 ; P2.4@3610,-4234.53 cw(c3610,-4269.6) 3634.8,-4244.8 cw(c3659.6,-4220) P2.4@3624.53,-4220 ; FPGA_Board1.45@3610,-3905 P2.4@3610,-4220 3675,-4285 4205,-4285 4340,-4150 AM1.1@4425,-4150 ; AM1.1@4407.66,-4167.34 ccw(c4365.79,-4209.21) 4365.79,-4150 ccw(c4365.79,-4090.79) AM1.1@4407.66,-4132.66 ; AM1.1@4414.73,-4160.27 ccw(c4389.93,-4185.07) 4389.93,-4150 ccw(c4389.93,-4114.93) AM1.1@4414.73,-4139.73
LED_GR: FPGA_Board1.48 GR1.1 P2.1 | length 1285.4
  Top Layer w10: P2.1@3892.66,-4202.66 ccw(c3850.79,-4160.79) 3910,-4160.79 ccw(c3969.21,-4160.79) P2.1@3927.34,-4202.66 ; FPGA_Board1.48@3892.66,-3922.34 cw(c3850.79,-3964.21) 3910,-3964.21 cw(c3969.21,-3964.21) 3927.34,-3922.34 cw(c3969.21,-3964.21) 3969.21,-3905 cw(c3969.21,-3845.79) FPGA_Board1.48@3927.34,-3887.66 ; P2.1@3899.73,-4209.73 ccw(c3874.93,-4184.93) 3910,-4184.93 ccw(c3945.07,-4184.93) P2.1@3920.27,-4209.73 ; FPGA_Board1.48@3899.73,-3915.27 cw(c3874.93,-3940.07) 3910,-3940.07 cw(c3945.07,-3940.07) 3920.27,-3915.27 cw(c3945.07,-3940.07) 3945.07,-3905 cw(c3945.07,-3869.93) FPGA_Board1.48@3920.27,-3894.73 ; P2.1@3910,-4220 FPGA_Board1.48@3910,-3905 4295,-3905 GR1.1@4300,-3900 ; 4228.71,-3905 ccw(c4228.71,-3828.71) GR1.1@4282.66,-3882.66 ; GR1.1@4282.66,-3917.34 ccw(c4252.86,-3947.14) 4252.86,-3905 ccw(c4252.86,-3852.86) GR1.1@4289.73,-3889.73
LED_RD: FPGA_Board1.46 P2.3 RD1.1 | length 1988.3
  Top Layer w10: P2.3@3692.66,-4202.66 ccw(c3650.79,-4160.79) 3710,-4160.79 ccw(c3769.21,-4160.79) P2.3@3727.34,-4202.66 ; FPGA_Board1.46@3692.66,-3922.34 cw(c3650.79,-3964.21) 3710,-3964.21 cw(c3769.21,-3964.21) FPGA_Board1.46@3727.34,-3922.34 ; P2.3@3699.73,-4209.73 ccw(c3674.93,-4184.93) 3710,-4184.93 ccw(c3745.07,-4184.93) P2.3@3720.27,-4209.73 ; FPGA_Board1.46@3699.73,-3915.27 cw(c3674.93,-3940.07) 3710,-3940.07 cw(c3745.07,-3940.07) FPGA_Board1.46@3720.27,-3915.27 ; P2.3@3710,-4220 FPGA_Board1.46@3710,-3905 3749.86,-3905 ; FPGA_Board1.46@3731.9,-3916.05 cw(c3749.86,-3925.12) 3749.86,-3905 ; FPGA_Board1.46@3731.9,-3893.95 ccw(c3749.86,-3884.88) 3749.86,-3905 ; RD1.1@4682.66,-3917.34 ccw(c4640.79,-3959.21) 4640.79,-3900 ccw(c4640.79,-3840.79) RD1.1@4682.66,-3882.66 ; RD1.1@4689.73,-3910.27 ccw(c4664.93,-3935.07) 4664.93,-3900 ccw(c4664.93,-3864.93) RD1.1@4689.73,-3889.73 ; RD1.1@4700,-3900 4595,-3900 4505,-3810 4505,-3750 4465,-3710 4295,-3710 4160.53,-3844.47 3810.38,-3844.47 3749.86,-3905
LED_YL: FPGA_Board1.47 P2.2 YL1.1 | length 1472.6
  Top Layer w10: P2.2@3792.66,-4202.66 ccw(c3750.79,-4160.79) 3810,-4160.79 ccw(c3869.21,-4160.79) P2.2@3827.34,-4202.66 ; FPGA_Board1.47@3792.66,-3922.34 cw(c3750.79,-3964.21) 3810,-3964.21 cw(c3869.21,-3964.21) FPGA_Board1.47@3827.34,-3922.34 ; P2.2@3799.73,-4209.73 ccw(c3774.93,-4184.93) 3810,-4184.93 ccw(c3845.07,-4184.93) P2.2@3820.27,-4209.73 ; FPGA_Board1.47@3799.73,-3915.27 cw(c3774.93,-3940.07) 3810,-3940.07 cw(c3845.07,-3940.07) FPGA_Board1.47@3820.27,-3915.27 ; P2.2@3810,-4220 FPGA_Board1.47@3810,-3905 3849.86,-3905 ; FPGA_Board1.47@3831.9,-3916.05 cw(c3849.86,-3925.12) 3849.86,-3905 ; FPGA_Board1.47@3831.9,-3893.95 ccw(c3849.86,-3884.88) 3849.86,-3905 ; YL1.1@4407.66,-3792.34 ccw(c4365.79,-3834.21) 4365.79,-3775 ccw(c4365.79,-3715.79) YL1.1@4407.66,-3757.66 ; YL1.1@4414.73,-3785.27 ccw(c4389.93,-3810.07) 4389.93,-3775 ccw(c4389.93,-3739.93) YL1.1@4414.73,-3764.73 ; YL1.1@4425,-3775 4270,-3775 4182.53,-3862.47 3892.38,-3862.47 3849.86,-3905
MODERW0: FPGA_Board1.22 MUX6.17 P1.22 | length 1112.8
  Top Layer w10: MUX6.17@1769.84,-2653.19 1769.84,-2879.84 1810,-2920 P1.22@1810,-2990 FPGA_Board1.22@1810,-3305 ; FPGA_Board1.22@1792.66,-3287.66 ccw(c1750.79,-3245.79) 1810,-3245.79 ccw(c1869.21,-3245.79) FPGA_Board1.22@1827.34,-3287.66 ; P1.22@1792.66,-3007.34 cw(c1750.79,-3049.21) 1810,-3049.21 cw(c1869.21,-3049.21) P1.22@1827.34,-3007.34 ; P1.22@1792.66,-2972.66 ccw(c1750.79,-2930.79) 1810,-2930.79 ccw(c1869.21,-2930.79) P1.22@1827.34,-2972.66 ; FPGA_Board1.22@1799.73,-3294.73 ccw(c1774.93,-3269.93) 1810,-3269.93 ccw(c1845.07,-3269.93) FPGA_Board1.22@1820.27,-3294.73 ; P1.22@1799.73,-3000.27 cw(c1774.93,-3025.07) 1810,-3025.07 cw(c1845.07,-3025.07) P1.22@1820.27,-3000.27 ; P1.22@1799.73,-2979.73 ccw(c1774.93,-2954.93) 1810,-2954.93 ccw(c1845.07,-2954.93) P1.22@1820.27,-2979.73
MODERW1: FPGA_Board1.23 MUX6.16 P1.23 | length 1094.2
  Top Layer w10: FPGA_Board1.23@1692.66,-3287.66 ccw(c1650.79,-3245.79) 1710,-3245.79 ccw(c1769.21,-3245.79) FPGA_Board1.23@1727.34,-3287.66 ; P1.23@1692.66,-3007.34 cw(c1650.79,-3049.21) 1710,-3049.21 cw(c1769.21,-3049.21) P1.23@1727.34,-3007.34 ; P1.23@1693.61,-2971.75 ccw(c1660.61,-2935) 1710,-2935 ; FPGA_Board1.23@1699.73,-3294.73 ccw(c1674.93,-3269.93) 1710,-3269.93 ccw(c1745.07,-3269.93) FPGA_Board1.23@1720.27,-3294.73 ; P1.23@1699.73,-3000.27 cw(c1674.93,-3025.07) 1710,-3025.07 cw(c1745.07,-3025.07) P1.23@1720.27,-3000.27 ; P1.23@1700.29,-2979.19 ccw(c1680.74,-2957.43) 1710,-2957.43 ccw(c1739.26,-2957.43) P1.23@1719.71,-2979.19 ; FPGA_Board1.23@1710,-3305 P1.23@1710,-2990 1710,-2935 ; P1.23@1726.39,-2971.75 cw(c1759.39,-2935) 1710,-2935 ; MUX6.16@1744.25,-2653.19 1744.25,-2900.75 1710,-2935
NetAM1_2: AM1.2 R4.2 | length 290.4
  Top Layer w10: AM1.2@4545.45,-4167.34 cw(c4512.61,-4200.19) 4559.06,-4200.19 ; R4.2@4552.85,-4264.85 ccw(c4537.86,-4249.87) 4559.06,-4249.87 ccw(c4580.25,-4249.87) R4.2@4565.26,-4264.85 ; R4.2@4559.06,-4275 4559.06,-4153.74 AM1.2@4562.8,-4150 ; 4559.06,-4218.24 cw(c4631.04,-4218.24) AM1.2@4580.14,-4167.34 ; 4559.06,-4194.1 cw(c4606.9,-4194.1) AM1.2@4573.07,-4160.27
NetB1_1: B1.1 P6.1 | length 2758.2
  Top Layer w10: B1.1@1696.78,-823.46 cw(c1604.5,-915.74) 1735,-915.74 cw(c1865.5,-915.74) B1.1@1773.22,-823.46 ; B1.1@1696.78,-747.01 ccw(c1604.5,-654.74) 1735,-654.74 ccw(c1865.5,-654.74) B1.1@1773.22,-747.01 ; B1.1@1696.78,-213.22 cw(c1604.5,-305.5) 1735,-305.5 cw(c1865.5,-305.5) B1.1@1773.22,-213.22 ; B1.1@1703.85,-816.39 cw(c1628.64,-891.59) 1735,-891.59 cw(c1841.36,-891.59) B1.1@1766.15,-816.39 ; B1.1@1703.85,-754.08 ccw(c1628.64,-678.88) 1735,-678.88 ccw(c1841.36,-678.88) B1.1@1766.15,-754.08 ; B1.1@1703.85,-206.15 cw(c1628.64,-281.36) 1735,-281.36 cw(c1841.36,-281.36) B1.1@1766.15,-206.15 ; B1.1@1710.92,-809.32 cw(c1652.78,-867.45) 1735,-867.45 cw(c1817.22,-867.45) B1.1@1759.08,-809.32 ; B1.1@1710.92,-761.16 ccw(c1652.78,-703.02) 1735,-703.02 ccw(c1817.22,-703.02) B1.1@1759.08,-761.16 ; B1.1@1710.92,-199.08 cw(c1652.78,-257.22) 1735,-257.22 cw(c1817.22,-257.22) B1.1@1759.08,-199.08 ; B1.1@1735,-175 B1.1@1735,-785.24 1735,-1235 ; P6.1@1750.49,-1274.19 ccw(c1697.55,-1272.45) 1735,-1235 ; P6.1@1760.48,-1274.52 ccw(c1729.13,-1273.49) 1751.31,-1251.31 ccw(c1773.49,-1229.13) P6.1@1774.52,-1260.48 ; P6.1@1774.19,-1250.49 cw(c1772.45,-1197.55) 1735,-1235 ; P6.1@1775,-1275 1735,-1235
NetB3_1: B3.1 P12.1 | length 2772.4
  Top Layer w10: B3.1@2836.78,-823.46 cw(c2744.5,-915.74) 2875,-915.74 cw(c3005.5,-915.74) B3.1@2913.22,-823.46 ; B3.1@2836.78,-747.01 ccw(c2744.5,-654.74) 2875,-654.74 ccw(c3005.5,-654.74) B3.1@2913.22,-747.01 ; B3.1@2836.78,-213.22 cw(c2744.5,-305.5) 2875,-305.5 cw(c3005.5,-305.5) B3.1@2913.22,-213.22 ; B3.1@2843.85,-816.39 cw(c2768.64,-891.59) 2875,-891.59 cw(c2981.36,-891.59) B3.1@2906.15,-816.39 ; B3.1@2843.85,-754.08 ccw(c2768.64,-678.88) 2875,-678.88 ccw(c2981.36,-678.88) B3.1@2906.15,-754.08 ; B3.1@2843.85,-206.15 cw(c2768.64,-281.36) 2875,-281.36 cw(c2981.36,-281.36) B3.1@2906.15,-206.15 ; B3.1@2850.92,-809.32 cw(c2792.78,-867.45) 2875,-867.45 cw(c2957.22,-867.45) B3.1@2899.08,-809.32 ; B3.1@2850.92,-761.16 ccw(c2792.78,-703.02) 2875,-703.02 ccw(c2957.22,-703.02) B3.1@2899.08,-761.16 ; B3.1@2850.92,-199.08 cw(c2792.78,-257.22) 2875,-257.22 cw(c2957.22,-257.22) B3.1@2899.08,-199.08 ; B3.1@2875,-175 B3.1@2875,-785.24 2875,-1225 P12.1@2925,-1275 ; P12.1@2900.47,-1275 ccw(c2841.26,-1275) 2883.13,-1233.13 ccw(c2925,-1191.26) P12.1@2925,-1250.47 ; P12.1@2910.47,-1275 ccw(c2875.4,-1275) 2900.2,-1250.2 ccw(c2925,-1225.4) P12.1@2925,-1260.47
NetB4_1: B4.1 P14.1 | length 2772.4
  Top Layer w10: B4.1@586.78,-823.46 cw(c494.5,-915.74) 625,-915.74 cw(c755.5,-915.74) B4.1@663.22,-823.46 ; B4.1@586.78,-747.01 ccw(c494.5,-654.74) 625,-654.74 ccw(c755.5,-654.74) B4.1@663.22,-747.01 ; B4.1@586.78,-213.22 cw(c494.5,-305.5) 625,-305.5 cw(c755.5,-305.5) B4.1@663.22,-213.22 ; B4.1@593.85,-816.39 cw(c518.64,-891.59) 625,-891.59 cw(c731.36,-891.59) B4.1@656.15,-816.39 ; B4.1@593.85,-754.08 ccw(c518.64,-678.88) 625,-678.88 ccw(c731.36,-678.88) B4.1@656.15,-754.08 ; B4.1@593.85,-206.15 cw(c518.64,-281.36) 625,-281.36 cw(c731.36,-281.36) B4.1@656.15,-206.15 ; B4.1@600.92,-809.32 cw(c542.78,-867.45) 625,-867.45 cw(c707.22,-867.45) B4.1@649.08,-809.32 ; B4.1@600.92,-761.16 ccw(c542.78,-703.02) 625,-703.02 ccw(c707.22,-703.02) B4.1@649.08,-761.16 ; B4.1@600.92,-199.08 cw(c542.78,-257.22) 625,-257.22 cw(c707.22,-257.22) B4.1@649.08,-199.08 ; B4.1@625,-175 B4.1@625,-785.24 625,-1225 P14.1@675,-1275 ; P14.1@650.47,-1275 ccw(c591.26,-1275) 633.13,-1233.13 ccw(c675,-1191.26) P14.1@675,-1250.47 ; P14.1@660.47,-1275 ccw(c625.4,-1275) 650.2,-1250.2 ccw(c675,-1225.4) P14.1@675,-1260.47
NetBNC1_1: BNC1.1 P5.1 | length 1110.1
  Top Layer w10: P5.1@2025,-1275 2300,-1000 BNC1.1@2300,-575 ; P5.1@2025,-1260.47 ccw(c2025,-1225.4) 2049.8,-1250.2 ccw(c2074.6,-1275) P5.1@2039.53,-1275 ; P5.1@2025,-1250.47 ccw(c2025,-1191.26) 2066.87,-1233.13 ccw(c2108.74,-1275) P5.1@2049.53,-1275 ; BNC1.1@2282.66,-592.34 cw(c2240.79,-634.21) 2300,-634.21 cw(c2359.21,-634.21) BNC1.1@2317.34,-592.34 ; BNC1.1@2289.73,-585.27 cw(c2264.93,-610.07) 2300,-610.07 cw(c2335.07,-610.07) BNC1.1@2310.27,-585.27
NetBNC2_1: BNC2.1 P8.1 | length 1110.1
  Top Layer w10: P8.1@3157.66,-1257.66 ccw(c3115.79,-1215.79) 3175,-1215.79 ccw(c3234.21,-1215.79) P8.1@3192.34,-1257.66 ; P8.1@3164.73,-1264.73 ccw(c3139.93,-1239.93) 3175,-1239.93 ccw(c3210.07,-1239.93) P8.1@3185.27,-1264.73 ; P8.1@3175,-1275 3175,-955 3450,-680 BNC2.1@3450,-575 ; BNC2.1@3432.66,-592.34 cw(c3390.79,-634.21) 3450,-634.21 cw(c3509.21,-634.21) BNC2.1@3467.34,-592.34 ; BNC2.1@3439.73,-585.27 cw(c3414.93,-610.07) 3450,-610.07 cw(c3485.07,-610.07) BNC2.1@3460.27,-585.27
NetBNC3_1: BNC3.1 P17.1 | length 1099.8
  Top Layer w10: P17.1@925,-1275 1175,-1025 BNC3.1@1175,-575 ; P17.1@925,-1260.47 ccw(c925,-1225.4) 949.8,-1250.2 ccw(c974.6,-1275) P17.1@939.53,-1275 ; P17.1@925,-1250.47 ccw(c925,-1191.26) 966.87,-1233.13 ccw(c1008.74,-1275) P17.1@949.53,-1275 ; BNC3.1@1157.66,-592.34 cw(c1115.79,-634.21) 1175,-634.21 cw(c1234.21,-634.21) BNC3.1@1192.34,-592.34 ; BNC3.1@1164.73,-585.27 cw(c1139.93,-610.07) 1175,-610.07 cw(c1210.07,-610.07) BNC3.1@1185.27,-585.27